# Altium PCB PCB1.PcbDoc
Units mm, origin at the board's own origin, x right, y up, seen from the top; angles counter-clockwise.
Board outline 25 x 22 mm, 4 copper layers (Top Layer, Signal Layer 1, Signal Layer 2, Bottom Layer), stack 0.97 mm thick; 11 components, 9 nets, 203 pads, 9 vias.
Unrouted connection lines stored in the file: 38.
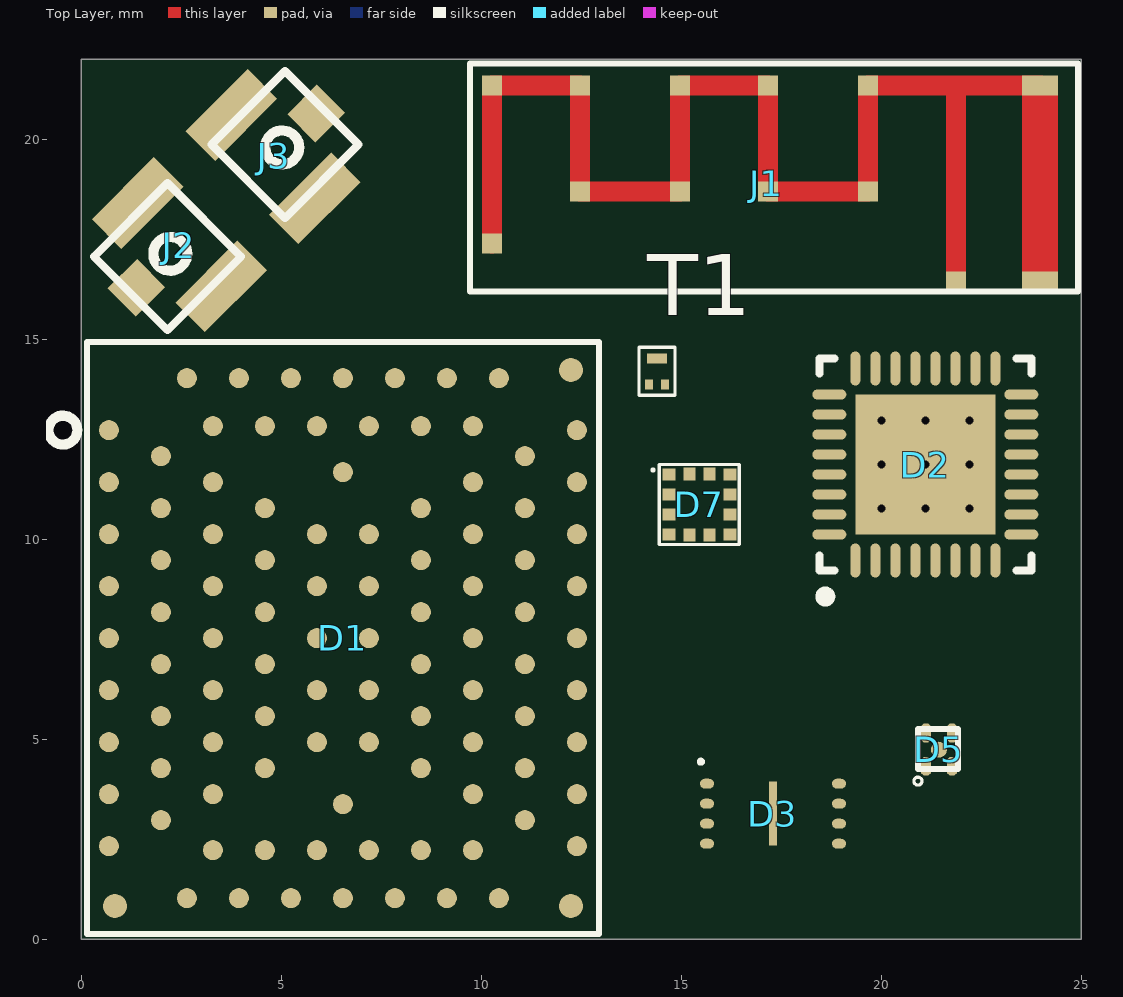
[diagram p0: Top Layer view]
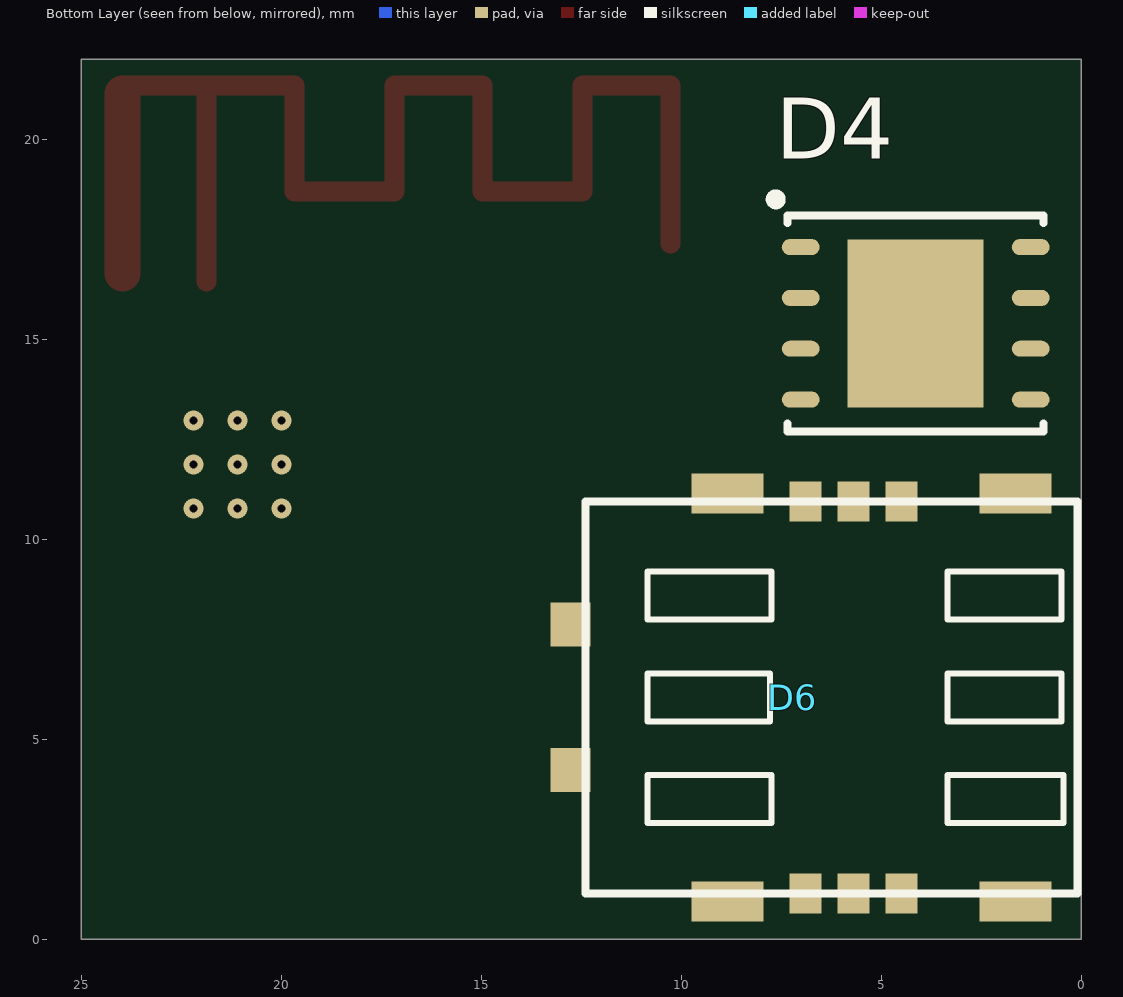
[diagram p1: Bottom Layer view, seen from below]

## Layer stack, top to bottom
Top Solder: solder mask 0.02, Solder Resist, Dk 3.8
Top Layer: signal copper 0.035
Dielectric 1: core 0.2, FR-4, Dk 4.6
Signal Layer 1: signal copper 0.0175
Dielectric 3: prepreg 0.465, Dk 4.2
Signal Layer 2: signal copper 0.0175
Dielectric 2: core 0.2, Dk 4.6
Bottom Layer: signal copper 0.035
Bottom Solder: solder mask 0.02, Solder Resist, Dk 3.8

## Board outline
0,0 25,0 25,22 0,22

## Design rules (kind name [scope] priority, off if disabled: settings)
Clearance Clearance_GND_ANT [(Net = 'NetD4_19')] p1: gap=0.15
Clearance [All] p2: gap=0.1
PlaneConnect PlaneConnect_via_ground [(ObjectKind = 'Via') And (Net = 'GND')] p1: planeconnectstyle=Relief reliefexpansion=0.508 reliefentries=4 reliefconductorwidth=0.254 reliefairgap=0.254
PlaneConnect [All] p2: planeconnectstyle=Relief reliefexpansion=0.508 reliefentries=4 reliefconductorwidth=0.254 reliefairgap=0.254
PolygonConnect PolygonConnect_1 [(ObjectKind = 'Via') And (Net = 'GND')] p1: connectstyle=Direct reliefconductorwidth=0.254 reliefentries=4 polygonreliefangle="90 Angle" airgapwidth=0.254
PolygonConnect [All] p2: connectstyle=Relief reliefconductorwidth=0.254 reliefentries=4 polygonreliefangle="90 Angle" airgapwidth=0.254
RoutingVias [All] p1: holewidth=0.2 width=0.45 viastyle="Through Hole" minholewidth=0.2 minwidth=0.45 maxholewidth=0.2 maxwidth=2
SolderMaskExpansion [All] p1: expansion=0.102
Width Width_1 [All] p1: maxlimit=0.5 minlimit=0.1 preferedwidth=0.2
Width Width_0_5_Power [InNet('3V3')] p2: maxlimit=1 minlimit=0.2 preferedwidth=0.5
29 further rules are at their usual default settings.

## Components (designator, comment, footprint, x,y, rotation, side; value= is the part's Value field where it differs from the comment)
D1 "SIM7090G" SIM7090G 6.54,7.53 r0 top
D2 "NRF52811-QCAA-R7" QFN32_nrf52811 21.1,11.87 r90 top
D3 "AT25SF081-MAHD-T" UDFN8 17.29,3.14 r0 top
D4 "eSim" VQFN8 4.14,15.4 r270 bottom
D5 "MIC5504-3.3YMT" TDFN4 21.115,5.155 r0 top
D6 "SimCard" 104224-0820 6.9,10.95 r90 bottom
D7 "IIS2DH" LGA12 14.687,11.618 r0 top
J1 "ZigZag_PIFA" ZigZag_PIFA 23.97,16.44 r180 top
J2 "Connector(U.FL)" U.FL 1.375,16.289 r135 top
J3 "Connector(U.FL)" U.FL 5.871,20.645 r315 top
T1 "CSD25483F4T" CSD17483F4 14.39,14.52 r0 top

## Footprints (in the part's own frame and the unit in brackets; to place one, negate y for a bottom-side part, rotate by r counter-clockwise, add the part's x,y. Pads: shape width x height; smd on the part's side, far side on the other; paste and mask are expansions set on the pad)
104224-0820 [mm]
  rect 1x0.8 smd: 1(0,-2.4) 2(0,-1.2) 3(-9.8,-2.4) 4(0,0) 5(-9.8,-1.2) 6(-9.8,0)
  rect 1x1.8 smd: 4(-10,-5.25) 4(-10,1.95) 4(0.2,-5.25) 4(0.2,1.95)
  rect 1.1x1 smd: 11(-3.08,5.875) 12(-6.72,5.875)
  silkscreen extent -9.8,-6.8 0,5.5
CSD17483F4 [mm]
  rect 0.2x0.25 smd: 1(-0.2,-0.65) 2(0.2,-0.65)
  rect 0.5x0.25 smd: 3(0,0)
  silkscreen extent -0.45,-0.92 0.45,0.28
LGA12 [mm]
  rect 0.325x0.3 smd: 1(0,0) 2(0,-0.5) 3(0,-1) 4(0,-1.5) 7(1.525,-1.5) 8(1.525,-1) 9(1.525,-0.5) 10(1.525,0)
  rect 0.3x0.325 smd: 5(0.513,-1.512) 6(1.012,-1.512) 11(1.012,0.012) 12(0.513,0.012)
  silkscreen extent -0.41,-1.75 1.76,0.25
QFN32_nrf52811 [mm]
  oval 0.85x0.25 smd: 1(-2.4,1.75) 2(-2.4,1.25) 3(-2.4,0.75) 4(-2.4,0.25) 5(-2.4,-0.25) 6(-2.4,-0.75) 7(-2.4,-1.25) 8(-2.4,-1.75) 17(2.4,-1.75) 18(2.4,-1.25) 19(2.4,-0.75) 20(2.4,-0.25) 21(2.4,0.25) 22(2.4,0.75) 23(2.4,1.25) 24(2.4,1.75)
  oval 0.25x0.85 smd: 9(-1.75,-2.4) 10(-1.25,-2.4) 11(-0.75,-2.4) 12(-0.25,-2.4) 13(0.25,-2.4) 14(0.75,-2.4) 15(1.25,-2.4) 16(1.75,-2.4) 25(1.75,2.4) 26(1.25,2.4) 27(0.75,2.4) 28(0.25,2.4) 29(-0.25,2.4) 30(-0.75,2.4) 31(-1.25,2.4) 32(-1.75,2.4)
  rect 3.5x3.5 smd: 33(0,0)
  silkscreen extent -3.42,-2.65 2.65,2.65, body extent -2.5,-2.5 2.5,2.5, height 0.9
SIM7090G [mm]
  round 0.5 smd: 1(-5.85,5.2) 2(-5.85,3.9) 3(-5.85,2.6) 4(-5.85,1.3) 5(-5.85,0) 6(-5.85,-1.3) 7(-5.85,-2.6) 8(-5.85,-3.9) 9(-5.85,-5.2) 10(-3.9,-6.5) 11(-2.6,-6.5) 12(-1.3,-6.5) 13(0,-6.5) 14(1.3,-6.5) 15(2.6,-6.5) 16(3.9,-6.5) 17(5.85,-5.2) 18(5.85,-3.9) 19(5.85,-2.6) 20(5.85,-1.3) 21(5.85,0) 22(5.85,1.3) 23(5.85,2.6) 24(5.85,3.9) 25(5.85,5.2) 26(3.9,6.5) 27(2.6,6.5) 28(1.3,6.5) 29(0,6.5) 30(-1.3,6.5) 31(-2.6,6.5) 32(-3.9,6.5) 33(-4.55,4.55) 34(-4.55,3.25) 35(-4.55,1.95) 36(-4.55,0.65) 37(-4.55,-0.65) 38(-4.55,-1.95) 39(-4.55,-3.25) 40(-4.55,-4.55) 41(-1.95,-5.3) 42(-0.65,-5.3) 43(0.65,-5.3) 44(1.95,-5.3) 45(4.55,-4.55) 46(4.55,-3.25) 47(4.55,-1.95) 48(4.55,-0.65) 49(4.55,0.65) 50(4.55,1.95) 51(4.55,3.25) 52(4.55,4.55) 53(1.95,5.3) 54(0.65,5.3) 55(-0.65,5.3) 56(-1.95,5.3) 57(-3.25,3.9) 58(-3.25,2.6) 59(-3.25,1.3) 60(-3.25,0) 61(-3.25,-1.3) 62(-3.25,-2.6) 63(-3.25,-3.9) 64(0,-4.15) 65(3.25,-3.9) 66(3.25,-2.6) 67(3.25,-1.3) 68(3.25,0) 69(3.25,1.3) 70(3.25,2.6) 71(3.25,3.9) 73(-1.95,3.25) 74(-1.95,1.95) 75(-1.95,0.65) 76(-1.95,-0.65) 77(-1.95,-1.95) 78(-1.95,-3.25) 79(1.95,-3.25) 80(1.95,-1.95) 81(1.95,-0.65) 82(1.95,0.65) 83(1.95,1.95) 84(1.95,3.25) 85(-0.65,2.6) 86(-0.65,1.3) 87(-0.65,0) 88(-0.65,-1.3) 89(-0.65,-2.6) 90(0.65,-2.6) 91(0.65,-1.3) 92(0.65,0) 93(0.65,1.3) 94(0.65,2.6) 95(-3.25,5.3) 96(-3.25,-5.3) 97(3.25,-5.3) 98(3.25,5.3) 129(0,4.15)
  round 0.6 smd: 99(-5.7,-6.7) 100(5.7,-6.7) 101(5.7,6.7)
  silkscreen extent -7.36,-7.4 6.4,7.4, body extent -6.2,-7.1 6.2,7.1, height 1.85
TDFN4 [mm]
  oct 0.25x0.47 smd: 1(0,-0.83) 2(0.65,-0.83) 3(0.65,0) 4(0,0)
  round 0.4 smd: 5(0.325,-0.415)
  silkscreen extent -0.3,-1.3 0.8,0.1
U.FL [mm]
  rect 1x1.05 smd: 1(0,0)
  rect 1.05x2.2 smd: 2(-1.475,-1.525) 2(1.475,-1.525)
  silkscreen extent -1.3,-2.4 1.3,0.2
UDFN8 [mm]
  oval 0.35x0.25 smd: 1(-1.65,0.75) 2(-1.65,0.25) 3(-1.65,-0.25) 4(-1.65,-0.75) 5(1.65,-0.75) 6(1.65,-0.25) 7(1.65,0.25) 8(1.65,0.75)
  rect 0.2x1.6 smd: 9(0,0)
  silkscreen extent -1.85,1.25 -1.75,1.35, body extent -1.5,-1 1.5,1, height 0.55
VQFN8 [mm] "VQFN8"
  oval 0.4x0.95 smd: 1(-1.905,-2.875) 2(-0.635,-2.875) 3(0.635,-2.875) 4(1.905,-2.875) 5(1.905,2.875) 6(0.635,2.875) 7(-0.635,2.875) 8(-1.905,2.875)
  rect 4.2x3.4 smd: 9(0,0)
  silkscreen extent -3.22,-3.63 2.7,3.2, body extent -2.55,-3.05 2.55,3.05, height 0.9
ZigZag_PIFA [mm]
  rect 0.5x0.5 smd: 1(2.1,0) 3(4.3,-4.9) 4(4.3,-2.26) 5(6.8,-2.26) 6(6.8,-4.9) 7(9,-4.9) 8(9,-2.26) 9(11.5,-2.26) 10(11.5,-4.9) 11(13.7,-4.9) 12(13.7,-0.96)
  rect 0.9x0.5 smd: 2(0,-4.9) GND(0,0)
  Top Layer lines w0.5: 13.7,-0.96 13.7,-4.9 11.5,-4.9 11.5,-2.26 9,-2.26 9,-4.9 6.8,-4.9 6.8,-2.26 4.3,-2.26 4.3,-4.9 0,-4.9 ; 2.1,0 2.1,-4.867
  Top Layer lines w0.9: 0,-0.202 0,-4.7
  silkscreen extent -0.95,-5.45 14.25,0.25

## Via types
v1: diameter 0.5, hole 0.2, Top Layer to Bottom Layer, tented both sides, 9 vias

## Nets (pads, with @x,y where several pads share a name; then routed paths per layer and width w, separated by ;. In a path a pad name is that pad's centre, name@x,y a point inside that pad or via, vN(x,y) a via of type N, cw(c..) or ccw(c..) an arc to the next point about the centre after c; other vN are vias at no path point)
3V8: D1.19 D1.20 D1.21
GND: D1.22 D1.23 D1.24 D1.25 D1.27 D1.28 D1.30 D1.31 D1.43 D1.52 D1.53 D1.54 D1.55 D1.56 D1.58 D1.65 D1.66 D1.73 D1.74 D1.75 D1.84 D1.85 D1.86 D1.88 D1.89 D6.4
NetD1_13: D1.13 D6.3
NetD1_14: D1.14 D6.6
NetD1_15: D1.15 D6.2
NetD1_16: D1.16 D6.1
NetD1_26: D1.26 J3.1
NetD1_32: D1.32 J2.1
NetD2_19: D2.19 J1.1
pads on no net: D1.1 D1.2 D1.3 D1.4 D1.5 D1.6 D1.7 D1.8 D1.9 D1.10 D1.11 D1.12 D1.17 D1.18 D1.29 D1.33 D1.34 D1.35 D1.36 D1.37 D1.38 D1.39 D1.40 D1.41 D1.42 D1.44 D1.45 D1.46 D1.47 D1.48 D1.49 D1.50 D1.51 D1.57 D1.59 D1.60 D1.61 D1.62 D1.63 D1.64 D1.67 D1.68 D1.69 D1.70 D1.71 D1.76 D1.77 D1.78 D1.79 D1.80 D1.81 D1.82 D1.83 D1.87 D1.90 D1.91 D1.92 D1.93 D1.94 D1.95 D1.96 D1.97 D1.98 D1.99 D1.100 D1.101 D1.129 D2.1 D2.2 D2.3 D2.4 D2.5 D2.6 D2.7 D2.8 D2.9 D2.10 D2.11 D2.12 D2.13 D2.14 D2.15 D2.16 D2.17 D2.18 D2.20 D2.21 D2.22 D2.23 D2.24 D2.25 D2.26 D2.27 D2.28 D2.29 D2.30 D2.31 D2.32 D2.33 D3.1 D3.2 D3.3 D3.4 D3.5 D3.6 D3.7 D3.8 D3.9 D4.1 D4.2 D4.3 D4.4 D4.5 D4.6 D4.7 D4.8 D4.9 D5.1 D5.2 D5.3 D5.4 D5.5 D6.5 D6.11 D6.12 D7.1 D7.2 D7.3 D7.4 D7.5 D7.6 D7.7 D7.8 D7.9 D7.10 D7.11 D7.12 J1.2 J1.3 J1.4 J1.5 J1.6 J1.7 J1.8 J1.9 J1.10 J1.11 J1.12 J1.GND J2.2 J3.2 T1.1 T1.2 T1.3
copper on no net:
  other v1: 20,10.77 21.1,10.77 22.2,10.77 20,11.87 21.1,11.87 22.2,11.87 20,12.97 21.1,12.97 22.2,12.97

## Silkscreen, mask and mechanical layers (free items; w line width, h text height)
Mechanical 1:
  the board outline again, w0.15